# Altium PCB OTP6.PcbDoc
Units mm, origin at the board's own origin, x right, y up, seen from the top; angles counter-clockwise.
Board outline 16.5 x 30.68 mm, 4 copper layers (Top Layer, Internal Plane 1, Internal Plane 2, Bottom Layer), stack 0.778 mm thick; 29 components, 21 nets, 117 pads, 37 vias.
Unrouted connection lines stored in the file: 3.
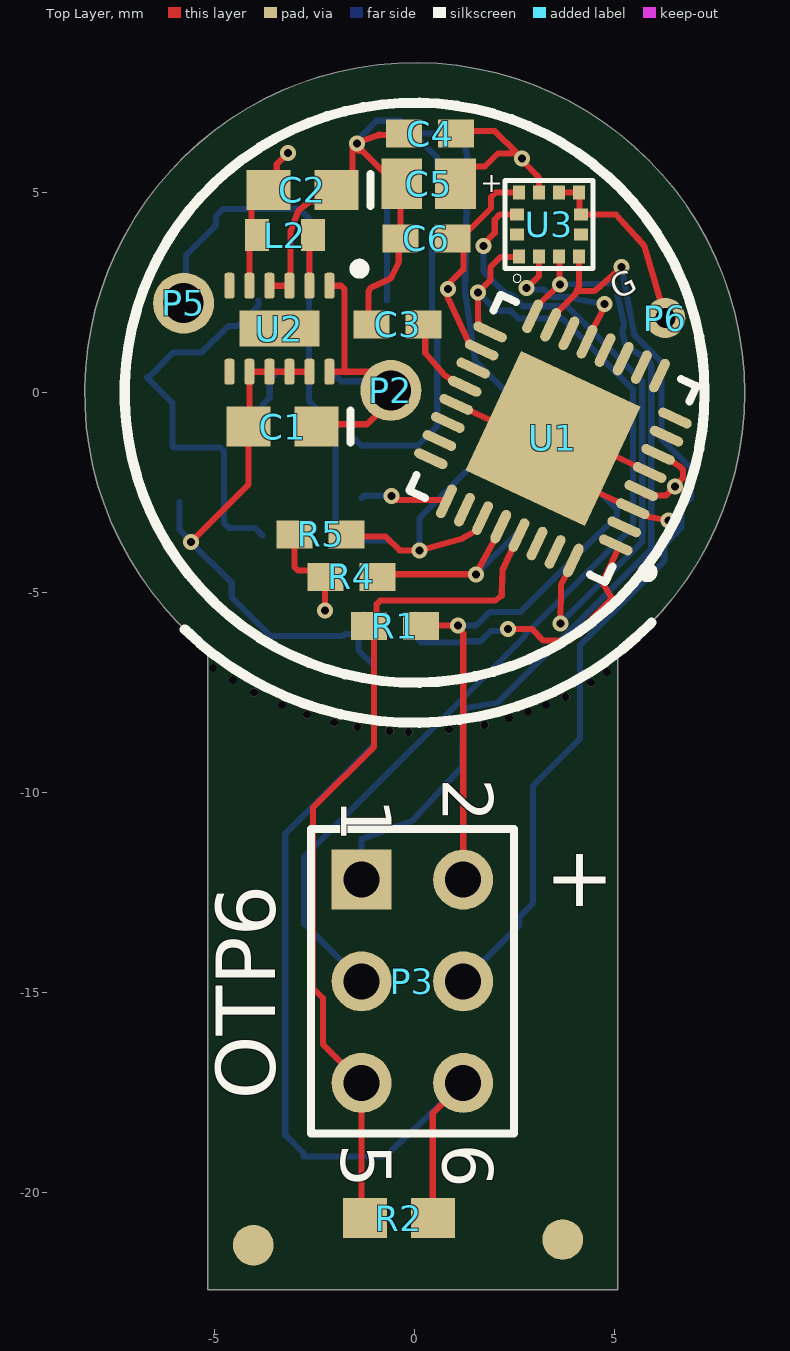
[diagram p0: Top Layer view]
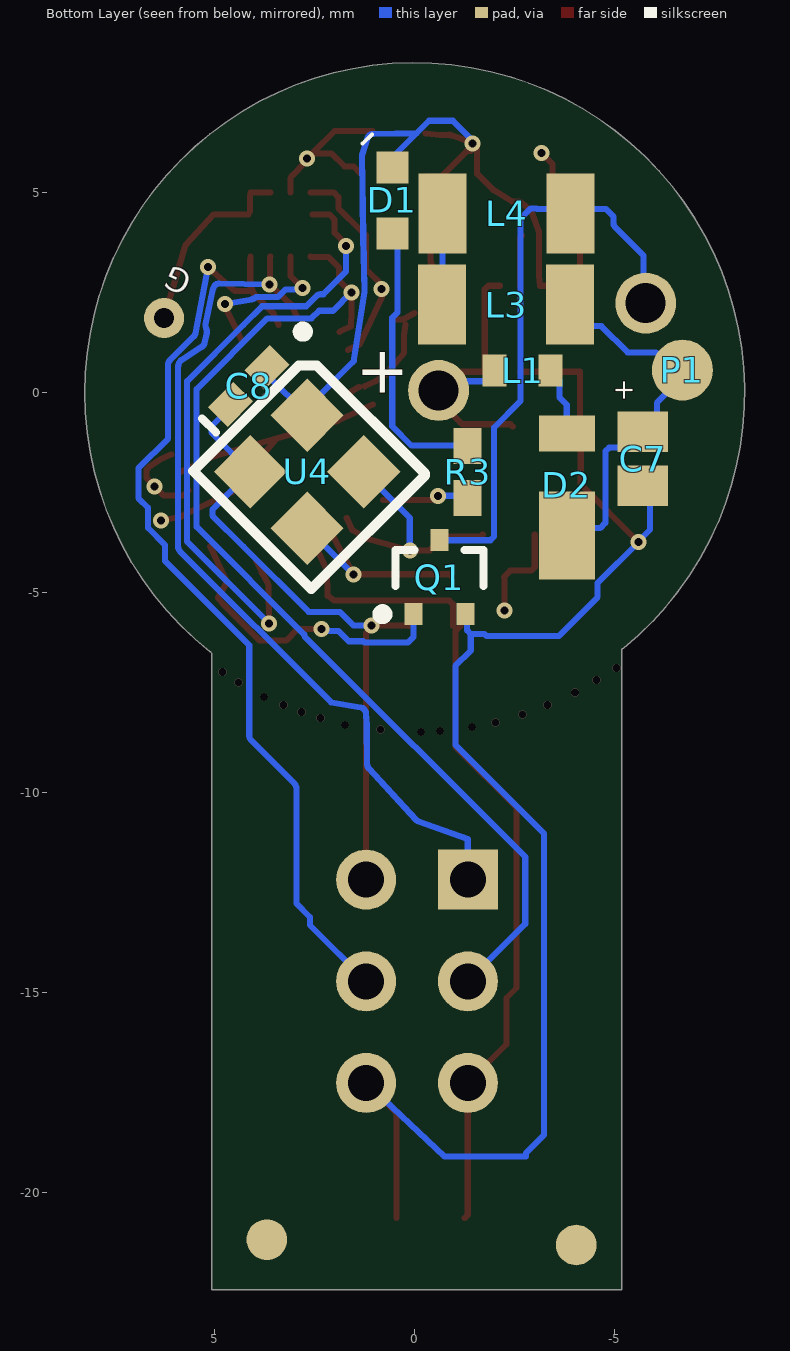
[diagram p1: Bottom Layer view, seen from below]
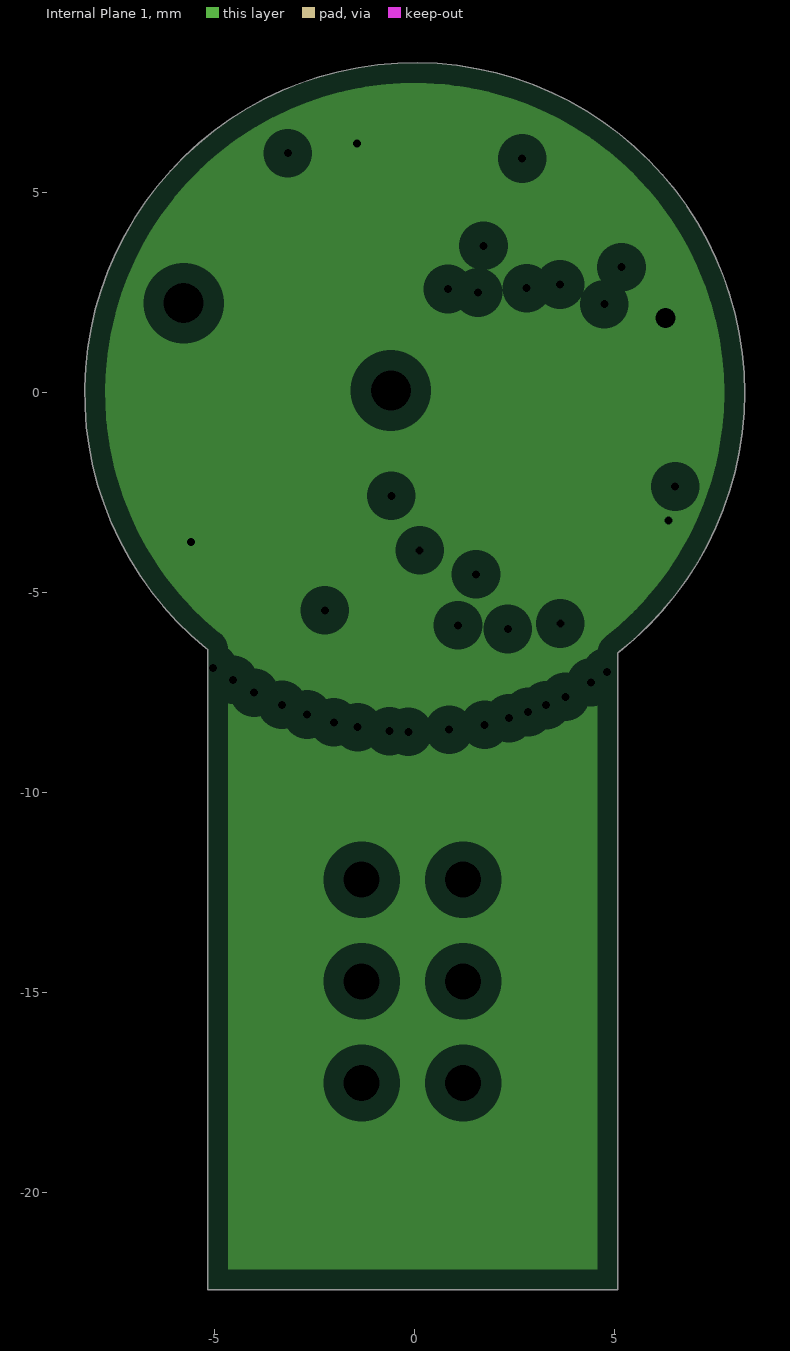
[diagram p2: Internal Plane 1, clearances drawn from the general rule]
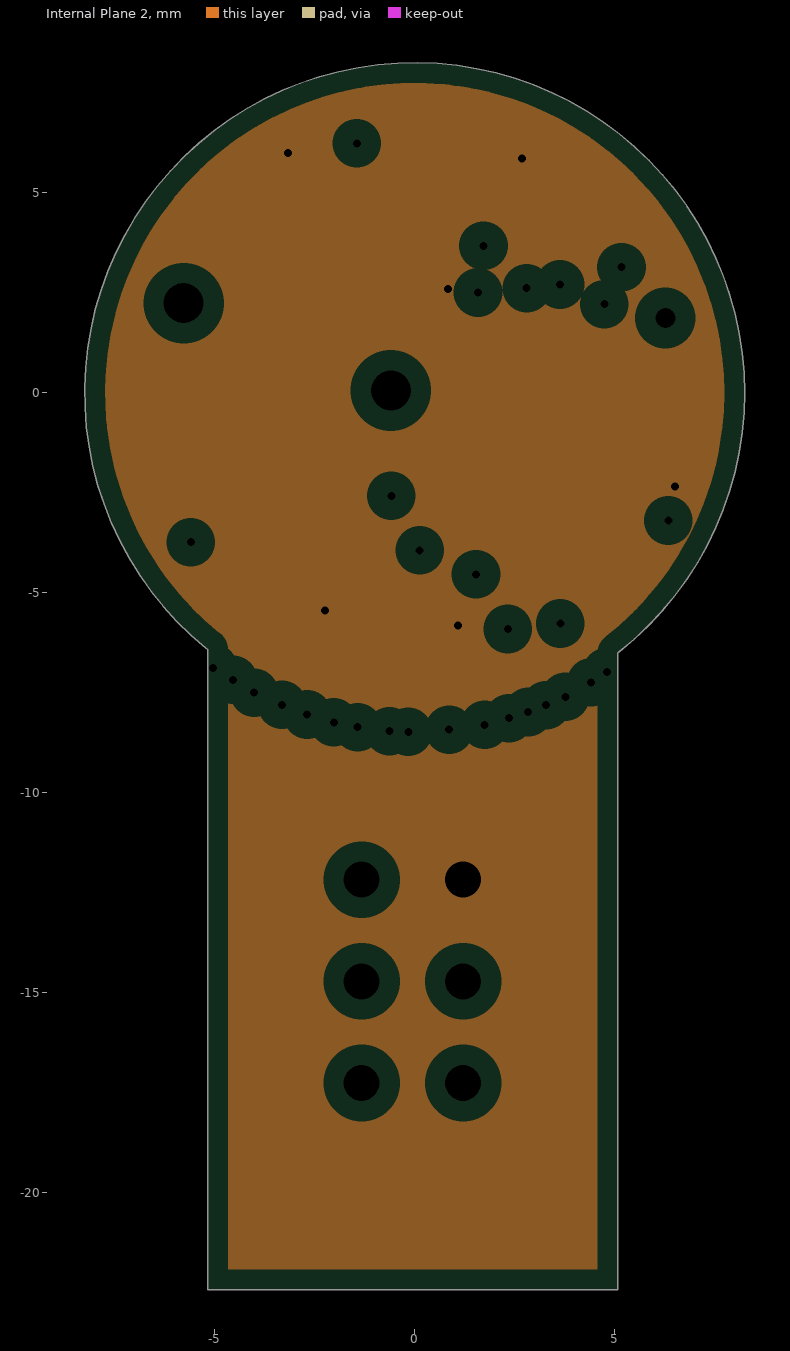
[diagram p3: Internal Plane 2, clearances drawn from the general rule]

## Layer stack, top to bottom
Top Solder: solder mask 0.0102, Solder Resist, Dk 3.5
Top Layer: signal copper 0.0356
Dielectric 1: core 0.254, FR-4, Dk 4.2
Internal Plane 1: plane copper 0.036, net GND
Dielectric 3: prepreg 0.127, Dk 4.2
Internal Plane 2: plane copper 0.036, net V1.8
Dielectric 2: core 0.254, Dk 4.2
Bottom Layer: signal copper 0.0356
Bottom Solder: solder mask 0.0102, Solder Resist, Dk 3.5

## Board outline
-5.173,-22.426 -5.173,-6.414 -5.219,-6.389 cw(c0,0) 5.115,-6.474 5.079,-6.507 5.079,-22.426

## Design rules (kind name [scope] priority, off if disabled: settings)
Clearance [All] p1: gap=0 ignorepadtopadclearanceinfootprint=FALSE
PlaneClearance [All] p1: clearance=0.508
PlaneConnect [All] p1: planeconnectstyle=Relief reliefexpansion=0.508 reliefentries=4 reliefconductorwidth=0.254 reliefairgap=0.254
PolygonConnect [All] p1: connectstyle=Relief reliefconductorwidth=0.254 reliefentries=4 polygonreliefangle="90 Angle" airgapwidth=0.254
RoutingVias [All] p1: holewidth=0.279 width=0.559 viastyle="Through Hole" minholewidth=0.2 minwidth=0.3 maxholewidth=0.711 maxwidth=1.27
SolderMaskExpansion [All] p1: expansion=0.102 istentingtop=FALSE
Width [All] p1: maxlimit=0.762 minlimit=0.152 preferedwidth=0.152
28 further rules are at their usual default settings.

## Classes and differential pairs
component class OTP6_PingCircuit: C7 D2 L1 L3 L4 P1 P5 Q1
component class OTP6: C1 C2 C3 C4 C5 C6 C8 D1 L2 P2 P3 R1 R2 R3 R4 R5 U1 U2 U3 U4

## Components (designator, comment, footprint, x,y, rotation, side; value= is the part's Value field where it differs from the comment)
C1 "C0603" 0603 -3.301,-0.845 r180 top value=10uF
C2 "C0603" 0603 -2.81,5.074 r180 top value=10uF
C3 "0.1uF" 0402 -0.424,1.71 r180 top
C4 "100nF" 0402 0.385,6.478 r180 top value=100pF
C5 "10uF" Tant0805 0.349,5.222 r0 top
C6 "100nF" 0402 0.29,3.861 r180 top value=100pF
C7 "47uF" Tant0805 -5.698,-1.652 r90 bottom value=10uF
C8 "100nF" 0402 4.151,0.17 r135 bottom value=100pF
D1 "LED_0603" Diode0603 0.556,4.81 r90 bottom
D2 "Shottky" DFLS130 -3.801,-2.672 r90 bottom
L1 "47uH" "Inductor KLZ1608AHR" -2.699,0.55 r180 bottom
L2 "2.2uH" "Inductor KLZ1608AHR" -3.246,3.937 r0 top
L3 "120uH" Inductor_NLV32T -2.283,2.2 r0 bottom
L4 "120uH" Inductor_NLV32T -2.294,4.476 r180 bottom
P1 "Header 1x1 1mm" Header1x1mm#1 -6.693,0.566 r90 bottom
P2 "Header 1x1 1mm" Header1x1mm#2 -13.14,2.135 r0 top
P3 "AVR SPI" HDR2X3 -1.326,-12.176 r270 top
P5 "Header 1x1 1mm" Header1x1mm#3 -5.775,2.238 r0 top
P6 "Header 1x1 1mm" Header1x1mm#4 6.267,1.866 r0 top (schematic designator P4)
Q1 "PMF250XN,115" NXP-SOT323_N -0.617,-4.612 r90 bottom
R1 "10k" 2-0402 -0.492,-5.835 r0 top
R2 "omit" 3-0603 -0.397,-20.634 r0 top
R3 "330" 2-0402 -1.324,-1.982 r270 bottom
R4 "10k" 2-0402 -1.585,-4.603 r0 top
R5 "10k" 2-0402 -2.351,-3.542 r0 top
U1 "ATmega8-16AC" 32M1-A_M 3.456,-1.142 r155 top
U2 "TPS62740" TPS6274x -2.132,2.675 r270 top
U3 "LIS2DS12" LGA-12 2.609,3.407 r90 top
U4 "MS5837" MS5837 2.693,-0.56 r225 bottom

## Footprints (in the part's own frame and the unit in brackets; to place one, negate y for a bottom-side part, rotate by r counter-clockwise, add the part's x,y. Pads: shape width x height; smd on the part's side, far side on the other; paste and mask are expansions set on the pad)
2-0402 [mm] "Chip Resistor; Body 1 x 0.5 mm (LxW typ)"
  rect 0.9x0.7 smd: 1(-0.65,0) 2(0.65,0)
3-0603 [mm] "Chip Resistor; Body 1.6 x 0.9 mm (LxW typ)"
  rect 1.1x1 smd: 1(-0.85,0) 2(0.85,0)
32M1-A_M [mm] "QFN, 32-Leads, Body 5x5mm, Pitch 0.5mm, Thermal Pad 3.3x3.3mm, IPC Low Density"
  oval 0.9x0.25 smd: 1(-2.55,1.75) 2(-2.55,1.25) 3(-2.55,0.75) 4(-2.55,0.25) 5(-2.55,-0.25) 6(-2.55,-0.75) 7(-2.55,-1.25) 8(-2.55,-1.75) 17(2.55,-1.75) 18(2.55,-1.25) 19(2.55,-0.75) 20(2.55,-0.25) 21(2.55,0.25) 22(2.55,0.75) 23(2.55,1.25) 24(2.55,1.75)
  oval 0.25x0.9 smd: 9(-1.75,-2.55) 10(-1.25,-2.55) 11(-0.75,-2.55) 12(-0.25,-2.55) 13(0.25,-2.55) 14(0.75,-2.55) 15(1.25,-2.55) 16(1.75,-2.55) 25(1.75,2.55) 26(1.25,2.55) 27(0.75,2.55) 28(0.25,2.55) 29(-0.25,2.55) 30(-0.75,2.55) 31(-1.25,2.55) 32(-1.75,2.55)
  rect 3.3x3.3 smd paste-1.2: 33(0,0)
  silkscreen extent -3.68,-2.7 2.7,2.7, body extent -2.55,-2.55 2.55,2.55, height 1
0402 [mm] "Chip Capacitor; Body 1.0 x 0.5 mm (LxW typ)"
  rect 0.9x0.7 smd: 1(-0.65,0) 2(0.65,0)
0603 [mm] "Chip Capacitor; Body 1.6 x 0.8 mm (LxW typ)"
  rect 1.1x1 smd: 1(-0.85,0) 2(0.85,0)
  silkscreen extent -1.7,-0.4 -1.7,0.4
DFLS130 [mm] "Diode"
  rect 0.9x1.4 smd: A(1.65,0)
  rect 2.2x1.4 smd: K(-0.9,0)
Diode0603 [mm]
  rect 0.8x0.8 smd: A(-0.825,0) K(0.825,0)
  silkscreen extent 1.42,0.51 1.65,0.74
HDR2X3 [mm] "Connector; Header; 3x2 Position"
  rect 1.5x1.5 hole 0.9: 1(0,0)
  round 1.5 hole 0.9: 2(0,2.54) 3(2.54,0) 4(2.54,2.54) 5(5.08,0) 6(5.08,2.54)
  silkscreen extent -1.27,-1.27 6.35,3.81
Header1x1mm#1 [mil]
  round 60 smd: 1(0,0)
Header1x1mm#2 [mil]
  round 60 hole 39.37: 1(493.88,-81.83)
Header1x1mm#3 [mil]
  round 60 hole 39.37: 1(0,0)
Header1x1mm#4 [mil]
  round 39.37 hole 19.68: 1(0,0)
"Inductor KLZ1608AHR" [mm]
  rect 0.6x0.8 smd: 1(-0.7,0) 2(0.7,0)
Inductor_NLV32T [mm]
  rect 1.2x2 smd: 1(-1.6,0) 2(1.6,0)
LGA-12 [mm] "LIS2DS12"
  rect 0.35x0.3 smd: 1(0,0) 2(0,-0.5) 3(0,-1) 4(0,-1.5) 7(1.6,-1.5) 8(1.6,-1) 9(1.6,-0.5) 10(1.6,0)
  rect 0.3x0.35 smd: 5(0.55,-1.55) 6(1.05,-1.55) 11(1.05,0.05) 12(0.55,0.05)
  silkscreen extent -0.65,-1.85 1.9,0.35
MS5837 [mm]
  rect 1.3x1.3 smd: 1(0,0) 2(0,-2) 3(2,-2) 4(2,0)
  silkscreen extent -1.67,-3 3.15,1.52
NXP-SOT323_N [mm] "SOT23, 3-Leads, Body 2.2x1.35mm, Pitch 0.65mm, IPC Medium Density"
  rect 0.55x0.45 smd: 1(-0.925,0.65) 2(-0.925,-0.65) 3(0.925,0)
  silkscreen extent -1.05,-1.1 0.67,1.55, body extent -0.67,-1.1 0.67,1.1, height 1.1
Tant0805 [mil]
  rect 40x50 smd: 1(-26.5,0) 2(26.5,0)
TPS6274x [mm] "QFN, 12-Leads, Body 2.00x3.00mm, Pitch 0.50mm, Thermal Pad 0.90x2.00mm, IPC Medium Density"
  rrect50% 0.65x0.25 smd: 1(0,0) 2(0,-0.5) 3(0,-1) 4(0,-1.5) 5(0,-2) 6(0,-2.5) 7(2.15,-2.5) 8(2.15,-2) 9(2.15,-1.5) 10(2.15,-1) 11(2.15,-0.5) 12(2.15,0)
  rect 0.9x2 smd paste-0.1: 13(1.075,-1.25)
  silkscreen extent -0.55,0.63 -0.3,0.88, body extent 0.03,-2.8 2.12,0.3, height 0.8

## Part data
C1 C2: "Ceramic Chip Capacitor - Standard", PackageDocument=Mar-2001, Code_IPC="1608 [0603]", Code_JEITA=0603, ComponentLink1Description="Manufacturer Link", ComponentLink1URL=http://www.kemet.com/, ComponentLink2Description=Datasheet, ComponentLink2URL=http://www.kemet.com/kemet/web/homepage/kechome.nsf/vapubfilesname/F3102TA.pdf/$file/F3102TA.pdf, DatasheetDocument=Mar-2001, LatestRevisionDate=19-Mar-2004, LatestRevisionNote="Silkscreen size reduced.", Note="Footprint corresponds to dimensions for bulk cassette packaging. This case size has tightened tolerances.", PackageReference=0603, Published=17-Jul-2002, Publisher="Altium Limited"
C3 C4 C6 C8: library part C0402, "Ceramic Chip Capacitor - Standard", PackageDocument=Mar-2001, Code_IPC="1005 [0402]", Code_JEITA=0402, ComponentLink1Description="Manufacturer Link", ComponentLink1URL=http://www.kemet.com/, ComponentLink2Description=Datasheet, ComponentLink2URL=http://www.kemet.com/kemet/web/homepage/kechome.nsf/vapubfilesname/F3102TA.pdf/$file/F3102TA.pdf, DatasheetDocument=Mar-2001, LatestRevisionDate=19-Mar-2004, LatestRevisionNote="Silkscreen size reduced.", Note="Footprint corresponds to dimensions for bulk cassette packaging. This case size has tightened tolerances.", PackageReference=0402, Published=17-Jul-2002, Publisher="Altium Limited"
C5 C7: library part Tant0805
D2: library part DFLS130, Supplier Part Number 1=DFLS130LDITR-ND, Supplier 1=Digi-Key
L1 L2: library part "Inductor KLZ1608", Supplier Part Number 1=810-KLZ1608AHR2R2WTD, Supplier 1=Mouser
L3 L4: library part Inductor_NLV32T, Supplier Part Number 1=NLV32T-121J-EFD, Supplier 1=Mouser
P1 P2 P5 P6: "1mm through hole"
P3: library part "Header 3X2", "Header, 3-Pin, Dual row", LatestRevisionDate=17-Jul-2002, LatestRevisionNote="Re-released for DXP Platform.", Publisher="Altium Limited"
Q1: "N-Channel Trench MOSFET, 30 V, 0.9 A, -55 to 150 degC, 3-Pin SOT323, Tape and Reel", Manufacturer="NXP Semiconductors", Supplier Part Number 1=568-10784-2-ND, Channel Type=N, Ciss [typ] (pF)=50, Code_JEITA=SC-70, ComponentLink1Description="Manufacturer URL", ComponentLink1URL=http://www.nxp.com/, ComponentLink2Description=Datasheet, ComponentLink2URL=http://www.nxp.com/documents/data_sheet/PMF250XN.pdf, ComponentLink3Description="Package Specification", ComponentLink3URL=http://www.nxp.com/documents/outline_drawing/sot323_po.pdf, Coss [typ] (pF)=10, DatasheetVersion="Rev. 1", ID [max] (A)=0.9, Mounting Technology="Surface Mount", PackageDescription="3-Pin Small Outline Transistor Package, Body 2 x 1.25 mm, Pitch 0.65 mm", PackageReference=SOT323, PackageVersion="06-03-16, 03/2006", Packing="Tape & Reel", PartNumber=PMF250XN,115, Supplier 1=Digi-Key, Supplier 2=Digi-Key, Supplier 3=Digi-Key, Supplier 4=Mouser, Supplier Part Number 2=568-10784-1-ND, Supplier Part Number 3=568-10784-6-ND, Supplier Part Number 4=771-PMF250XN,115, VDS [max] (V)=30, VGSth [typ] (V)=1
R1 R3 R4 R5: library part ERJ2RB, "Precision Thick Film Chip Resistor, 10 Ohm to 1M Ohm Range, 1% and 0.5% Tolerance, 0402 Size, 0.063 W", PackageDocument=Mar-2003, Code_IPC="1005 [0402]", ComponentLink1Description="Manufacturer Link", ComponentLink1URL=http://www.panasonic.com/industrial/components/resistive_products.htm, ComponentLink2Description=Datasheet, ComponentLink2URL=http://www.panasonic.com/industrial/components/pdf/AOA0000CE2.pdf, LatestRevisionDate=19-Mar-2004, LatestRevisionNote="Silkscreen size reduced.", PackageReference=2-0402, Published=17-Dec-2003, Publisher="Altium Limited"
R2: library part ERJ3RK, "Precision Thick Film Chip Resistor, 10 Ohm to 1M Ohm Range, 1% and 0.5% Tolerance, 0603 Size, 0.063 W", PackageDocument=Mar-2003, Code_IPC="1608 [0603]", ComponentLink1Description="Manufacturer Link", ComponentLink1URL=http://www.panasonic.com/industrial/components/resistive_products.htm, ComponentLink2Description=Datasheet, ComponentLink2URL=http://www.panasonic.com/industrial/components/pdf/AOA0000CE2.pdf, LatestRevisionDate=19-Mar-2004, LatestRevisionNote="Silkscreen size reduced.", PackageReference=3-0603, Published=17-Dec-2003, Publisher="Altium Limited"
U1: "8-Bit AVR Microcontroller with 8K Bytes of In-System Programmable Flash Memory", Code_JEDEC=MS-026-ABA, ComponentLink1Description="Manufacturer Link", ComponentLink1URL=http://www.atmel.com, ComponentLink2Description=Datasheet, ComponentLink2URL=http://www.atmel.com/dyn/resources/prod_documents/doc2486.pdf, DatasheetVersion=2486H-AVR-09/02, LatestRevisionDate=13-Apr-2006, LatestRevisionNote="IPC-7351 Footprint Added.", PackageDescription="32-Pin Thin Quad Flat Pack 0.8 mm Pitch", PackageReference=32A, PackageVersion="revB, Oct-2001", Published=17-Sep-2003, Publisher="Altium Limited"
U2: library part TPS6274x, Supplier 1=Farnell
U3: Supplier Part Number 1=497-16261-2-ND, Supplier 1=Digi-Key
U4: "Pressure/Temp", Supplier Part Number 1=223-1704-1-ND, Supplier 1=Digi-Key

## Free pads (board coordinates)
  round 1.016 smd far side paste-0.508 mask+0.127: 0(-4.038,-21.308) 0(3.696,-21.174)
  round 1.016 smd paste-0.508 mask+0.127: 0(-4.032,-21.31) 0(3.699,-21.171)

## Via types
v1: diameter 0.4, hole 0.2, Top Layer to Bottom Layer, tented both sides, 20 vias
v2: diameter 0.2, hole 0.2, Top Layer to Bottom Layer, 17 vias

## Nets (pads, with @x,y where several pads share a name; then routed paths per layer and width w, separated by ;. In a path a pad name is that pad's centre, name@x,y a point inside that pad or via, vN(x,y) a via of type N, cw(c..) or ccw(c..) an arc to the next point about the centre after c; other vN are vias at no path point)
BAT: C1.1 L1.1 P2.1 U2.1 U2.12 | length 9.8
  Top Layer w0.152: C1.1 -2.394,-0.788 -1.192,-0.788 P2.1@-0.927,-0.523 ; U2.12 -1.75,0.524 ; U2.1 -1.839,2.675 -1.75,2.585 -1.75,0.524 ; -1.138,-0.74 -0.924,-0.526 P2.1@-0.375,0.023 ; P2.1@-0.948,0.057 P2.1@-0.646,0.057 ; P2.1@-0.352,0 P2.1@-0.375,0.023 ; -1.75,0.524 -0.876,0.524 P2.1@-0.4,0.048 ; P2.1@-0.4,0.048 -0.35,0.048 P2.1@-0.375,0.023 ; P2.1@-0.4,0.048 P2.1@-0.375,0.023
  Bottom Layer w0.152: L1.1@-2.037,0.487 -1.836,0.286 -0.657,0.286 P2.1@-0.419,0.048 ; P2.1@-0.967,0.057 P2.1@-0.666,0.057 ; P2.1@-0.371,0 P2.1@-0.419,0.048 ; P2.1@-0.35,0.048 P2.1@-0.419,0.048
CS: U1.13 U3.2 | length 4
  Top Layer w0.152: v1(2.801,2.612) 3.109,2.92 U3.2 ; U1.13 4.445,1.569 v1@4.697,2.056 ; v1@4.697,2.056 cw(c4.832,1.986) 4.713,2.08 ccw(c4.593,2.175) 4.745,2.194 v1(4.742,2.213)
  Bottom Layer w0.152: v1(2.801,2.612) 2.831,2.583 3.23,2.583 3.421,2.391 3.971,2.391 3.985,2.378 ccw(c4.093,2.486) 4.065,2.336 v1(4.742,2.213)
DTR: P3.5 R1.1 R2.1 U1.29 | length 21.4
  Top Layer w0.152: R2.1 -1.326,-20.555 P3.5 -2.293,-16.288 -2.293,-15.132 -2.544,-14.882 -2.544,-10.38 -1.015,-8.851 -1.015,-5.961 R1.1 ; R1.1@-0.953,-5.835 -0.953,-5.285 -0.863,-5.196 2.015,-5.196 2.176,-5.076 2.196,-4.437 U1.29
GND: C1.2 C2.1 C3.2 C4.2 C5.1 C6.2 C7.1 C8.2 D1.K P3.6 P6.1 Q1.2 R2.2 U1.3 U1.5 U1.21 U1.33 U2.3 U2.4 U2.8 U2.9 U2.10 U2.11 U3.6 U3.7 U3.8 U4.1 | length 74.6
  Top Layer w0.152: v1(-5.594,-3.736) -4.151,-2.293 C1.2 -4.132,-0.827 U2.8 U2.9 U2.10 U2.11 ; U2.4@-3.583,2.723 U2.4 U2.3 -3.109,2.923 -3.109,3.983 cw(c-2.956,3.983) -3.099,4.035 -2.931,4.497 cw(c-2.788,4.445) -2.888,4.56 -2.675,4.745 cw(c-2.575,4.63) -2.575,4.783 -2.433,4.783 C2.1 -1.559,5.474 v1@-1.559,6.208 ; C3.2 -1.15,1.983 -1.15,2.504 cw(c-0.998,2.504) -1.06,2.643 -0.646,2.83 ccw(c-0.709,2.969) -0.571,2.903 -0.413,3.232 ccw(c-0.55,3.298) -0.398,3.298 -0.398,3.587 C6.2 -0.353,4.135 -0.353,4.664 C5.1 ; -0.893,6.434 cw(c-0.842,6.29) -0.842,6.443 -0.638,6.443 C4.2 ; -0.869,6.455 v1@-1.559,6.208 ; C5.1@-0.27,5.403 -0.661,5.403 -1.308,6.049 -1.4,6.049 v1@-1.559,6.208 ; R2.2 0.453,-18.016 P3.6 ; U1.21 1.334,-0.428 1.924,-0.704 U1.33 ; U3.8 U3.7 4.118,4.909 4.118,4.531 U3.6 5.03,4.457 5.709,3.713 cw(c5.597,3.61) 5.743,3.653 P6.1 ; U1.5 5.579,-1.856 4.988,-1.581 U1.33 ; v1(6.34,-3.194) 5.884,-3.107 cw(c5.912,-2.958) 5.836,-3.09 5.745,-3.037 U1.3 5.156,-2.762 4.566,-2.487 U1.33
  Bottom Layer w0.152: C7.1@-5.883,-2.729 -5.883,-3.42 -5.594,-3.709 v1(-5.594,-3.736) -4.573,-4.757 -4.573,-5.112 -3.6,-6.085 -1.8,-6.085 -1.749,-6.033 -1.399,-6.033 ; v1@-1.447,6.304 -0.952,6.798 -0.356,6.798 -0.044,6.486 ; Q1.2 -1.31,-5.58 -1.31,-5.944 -1.399,-6.033 ; D1.K 0.556,5.886 -0.044,6.486 ; P3.6 -0.748,-19.096 -2.779,-19.096 -2.779,-19.012 -3.236,-18.556 -3.236,-11.022 -1.016,-8.802 -1.016,-6.829 -1.399,-6.446 -1.399,-6.033 ; 1.255,2.527 1.514,0.841 1.521,0.792 1.556,0.757 2.693,-0.38 U4.1 2.693,-0.555 C8.2@3.71,0.462 ; 1.255,2.528 cw(c1.406,2.55) 1.254,2.554 1.288,3.888 ; 1.288,3.89 1.315,5.926 ccw(c1.162,5.928) 1.307,5.975 1.181,6.367 ccw(c1.036,6.32) 1.038,6.472 -0.044,6.486
  other v1: -1.445,6.235
HVDD: C7.2 D2.K L3.1 P1.1 | length 9.9
  Bottom Layer w0.152: L3.1@-3.902,2.304 -3.902,2.19 -4.426,1.667 -4.663,1.667 -5.322,1.008 -6.032,1.008 -6.651,0.389 -6.687,0.389 -6.687,0.378 -6.055,-0.254 -6.055,-1.345 -6.027,-1.373 -4.858,-1.373 -4.768,-1.462 -4.768,-3.251 -4.635,-3.385 -3.988,-3.385 D2.K
INT1: U3.12
INT2: U1.32 U3.11 | length 15.7
  Top Layer w0.152: v1(1.722,3.671) 1.722,3.716 2.003,3.997 2.003,4.33 2.131,4.457 U3.11 ; v1(3.643,-5.769) 3.644,-5.758 3.658,-4.832 cw(c3.81,-4.833) 3.677,-4.759 3.827,-4.487 U1.32
  Bottom Layer w0.152: v1(1.722,3.671) 1.722,3.025 2.285,2.462 2.348,2.462 ; 2.349,2.462 cw(c2.347,2.31) 2.454,2.418 2.607,2.267 2.713,2.161 3.815,2.161 4.281,1.694 5.689,0.286 5.689,-3.723 v1(3.643,-5.769)
LED1: R3.2 U1.25 | length 2.2
  Top Layer w0.152: v1(-0.582,-2.576) -0.479,-2.679 U1.25@0.79,-2.679
  Bottom Layer w0.152: R3.2 -1.268,-2.576 v1(-0.582,-2.576) v1@-0.582,-2.575
MISO: P3.1 U1.16 U3.3 | length 22
  Top Layer w0.152: U1.16 3.085,2.203 v1(3.634,2.705) 3.621,2.717 3.621,3.395 U3.3
  Bottom Layer w0.152: P3.1 -1.326,-11.155 -0.094,-10.717 ccw(c-0.144,-10.573) -0.032,-10.676 1.149,-9.391 ccw(c1.037,-9.288) 1.189,-9.29 1.199,-8.316 cw(c1.351,-8.317) 1.199,-8.307 1.22,-8.011 cw(c1.372,-8.022) 1.345,-7.872 ; 1.346,-7.872 2.086,-7.743 5.87,-3.959 ccw(c5.762,-3.851) 5.915,-3.851 5.915,0.643 ccw(c5.762,0.643) 5.911,0.675 5.902,0.717 ccw(c5.753,0.685) 5.836,0.813 5.321,1.147 ; v1(3.634,2.705) 4.886,2.73 cw(c4.889,2.578) 5.038,2.609 5.229,1.715 cw(c5.08,1.682) 5.214,1.61 ccw(c5.348,1.538) 5.199,1.507 5.255,1.243 ccw(c5.404,1.275) 5.321,1.148
MOSI: P3.4 U1.15 U3.4 | length 24.1
  Top Layer w0.152: U1.15 3.538,1.992 4.01,2.465 ccw(c3.902,2.573) 4.052,2.545 ; U3.4 4.113,3.309 4.113,2.725 cw(c3.962,2.705) 4.083,2.612 4.081,2.609 ccw(c4.202,2.517) 4.052,2.545 ; v1(5.17,3.14) 4.546,2.582 cw(c4.444,2.695) 4.444,2.543 4.083,2.545 4.08,2.545 4.052,2.545
  Bottom Layer w0.152: P3.4 2.619,-13.31 2.619,-13.108 2.96,-12.766 2.96,-9.881 cw(c3.113,-9.882) 3.004,-9.775 4.093,-8.686 ccw(c3.984,-8.579) 4.137,-8.579 4.137,-6.312 6.24,-4.209 6.24,-3.809 6.669,-3.381 6.669,-2.874 6.908,-2.635 6.908,-1.888 6.168,-1.147 6.168,0.7 ccw(c6.015,0.7) 6.124,0.807 5.524,1.407 cw(c5.632,1.514) 5.482,1.486 v1(5.17,3.14)
NetC3_1: C3.1 U1.20 | length 2.8
  Top Layer w0.152: C3.1@0.01,1.99 0.078,1.951 0.284,1.833 C3.1@0.536,1.833 ; C3.1 0.266,1.436 0.266,0.992 0.746,0.443 0.956,0.299 U1.20 ; U1.20@1.385,0.145 U1.20@1.576,0.036
NetD1_A: D1.A R3.1 | length 7.2
  Bottom Layer w0.152: R3.1@-1.48,-1.176 R3.1 -1.311,-1.319 0.082,-1.319 0.563,-0.837 0.563,1.873 0.429,2.007 0.429,3.858 D1.A
NetD2_A: D2.A L1.2 | length 1.7
  Bottom Layer w0.152: D2.A -3.801,-0.3 -3.623,-0.122 -3.623,0.326 L1.2
NetL2_2: L2.2 U2.2 | length 1.3
  Top Layer w0.152: L2.2@-2.682,3.93 -2.632,3.88 U2.2
NetL3_2: L3.2 L4.1 | length 2.3
  Bottom Layer w0.152: L3.2@-0.702,2.304 -0.69,2.316 L4.1@-0.69,4.595
PIEZO: L4.2 P5.1 Q1.3 | length 14.6
  Bottom Layer w0.152: P5.1 -5.717,2.295 -5.717,3.432 -5.011,4.138 ccw(c-5.12,4.245) -4.967,4.245 -4.967,4.408 -4.78,4.595 -3.061,4.595 -3.046,4.61 -2.905,4.61 -2.639,4.344 -2.639,-0.212 -1.981,-0.87 -1.981,-3.598 -1.892,-3.687 Q1.3
PWM: Q1.1 U1.1 | length 7.7
  Top Layer w0.152: v1(2.33,-5.906) 2.924,-5.906 3.215,-6.197 3.877,-6.197 4.79,-5.284 4.923,-5.134 4.735,-4.811 cw(c4.866,-4.734) 4.728,-4.669 5.112,-3.845 U1.1
  Bottom Layer w0.152: Q1.1 0.033,-6.111 0.165,-6.244 1.26,-6.244 1.29,-6.214 1.65,-6.214 1.91,-5.953 2.282,-5.953 v1(2.33,-5.906)
SCK: P3.3 U1.17 U3.1 | length 26.4
  Top Layer w0.152: U1.17 1.59,1.659 1.585,2.02 v1(1.585,2.507) 1.895,2.817 1.895,3.133 2.158,3.396 2.597,3.396 U3.1
  Bottom Layer w0.152: P3.3 -2.762,-13.28 -2.762,-11.603 2.758,-6.083 2.758,-6.048 5.455,-3.351 5.455,0.089 3.685,1.859 2.583,1.859 2.393,2.05 2.042,2.05 v1(1.585,2.507)
SCL: R4.2 U1.28 U4.3 | length 5.5
  Top Layer w0.152: R4.2 -0.871,-4.539 v1(1.532,-4.539) 2.015,-3.642 U1.28
  Bottom Layer w0.152: v1(1.532,-4.539) 2.683,-3.388 U4.3
SDA: R5.2 U1.27 U4.4 | length 6.3
  Top Layer w0.152: R5.2 -1.653,-3.59 -0.73,-3.59 -0.378,-3.942 v1(0.124,-3.942) 1.163,-3.655 ccw(c1.121,-3.509) 1.197,-3.641 1.562,-3.431 U1.27
  Bottom Layer w0.152: v1(0.124,-3.942) 0.124,-3.129 U4.4
V1.8: C2.2 C4.1 C5.2 C6.1 C8.1 L2.1 P3.2 R1.2 R4.1 R5.1 U1.4 U1.6 U1.18 U2.5 U3.9 U3.10 U4.2 | length 34.1
  Top Layer w0.152: U2.5 -4.132,3.88 -4.082,3.93 -4.082,5.058 C2.2@-4.02,5.12 ; C2.2 -3.447,5.286 -3.447,5.713 v1(-3.172,5.988) ; R5.1 -3.001,-4.36 -2.911,-4.45 -2.389,-4.45 R4.1 -2.245,-4.614 v1(-2.245,-5.442) ; R1.2 0.177,-5.815 v1(1.083,-5.815) 1.083,-5.882 1.214,-6.013 P3.2 ; v1@0.779,2.647 1.219,3.087 C6.1@1.219,3.939 ; v1(0.832,2.594) 0.727,2.594 1.379,1.206 U1.18 ; C4.1@1.06,6.54 2.006,6.54 v1@2.563,5.984 ; C6.1@1.323,4.03 1.908,4.615 1.908,4.889 2.026,5.007 U3.10 ; C5.2@1.349,5.477 1.527,5.655 1.755,5.655 2.084,5.984 v1@2.563,5.984 ; v1@2.662,5.829 2.733,5.758 3.065,5.426 cw(c2.957,5.319) 3.109,5.319 U3.9 ; v1(2.689,5.857) v1@2.563,5.984 ; U1.4 5.78,-2.565 6.285,-2.565 6.551,-2.299 6.551,-2.285 6.703,-2.133 6.703,-1.92 6.626,-1.843 6.379,-1.678 U1.6
  Bottom Layer w0.152: v1(1.083,-5.815) 1.535,-5.815 1.873,-5.477 2.653,-5.477 4.281,-3.85 5.058,-3.072 5.058,-2.925 U4.2 5.086,-0.995 5.086,-0.845 4.698,-0.457 C8.1@4.629,-0.457
  other v1: 6.511,-2.346
pads on no net: U1.2 U1.7 U1.8 U1.9 U1.10 U1.11 U1.12 U1.14 U1.19 U1.22 U1.23 U1.24 U1.26 U1.30 U1.31 U2.6 U2.7 U2.13 U3.5
copper on no net:
  other v2: -0.629,-8.461 -0.16,-8.477 0.861,-8.425 -1.426,-8.363 1.748,-8.301 -2.021,-8.241 2.359,-8.135 -2.69,-8.045 2.836,-7.982 -3.318,-7.802 3.282,-7.812 3.766,-7.605 -4.013,-7.497 4.412,-7.24 -4.541,-7.18 4.808,-6.982 -5.04,-6.879

## Polygon pours and split planes (outlines as drawn)
GND on Internal Plane 1 (split plane): 175 vertices, not listed, extent -7.741,-8.123 7.742,7.742
no net on Internal Plane 1 (split plane): -4.655,-6.967 -4.308,-7.187 -3.95,-7.39 -3.583,-7.575 -3.207,-7.742 -2.823,-7.89 -2.432,-8.019 -2.036,-8.128 -1.635,-8.219 -1.23,-8.289 -0.821,-8.339 -0.411,-8.369 0,-8.38 0.411,-8.369 0.821,-8.339 1.23,-8.289 1.635,-8.219 2.036,-8.128 2.432,-8.019 2.823,-7.89 3.207,-7.742 3.583,-7.575 3.95,-7.39 4.308,-7.187 4.569,-7.022 4.569,-21.916 -4.663,-21.916 -4.663,-6.962
V1.8 on Internal Plane 2 (split plane): 175 vertices, not listed, extent -7.741,-8.123 7.742,7.742
V1.8 on Internal Plane 2 (split plane): -4.655,-6.967 -4.308,-7.187 -3.95,-7.39 -3.583,-7.575 -3.207,-7.742 -2.823,-7.89 -2.432,-8.019 -2.036,-8.128 -1.635,-8.219 -1.23,-8.289 -0.821,-8.339 -0.411,-8.369 0,-8.38 0.411,-8.369 0.821,-8.339 1.23,-8.289 1.635,-8.219 2.036,-8.128 2.432,-8.019 2.823,-7.89 3.207,-7.742 3.583,-7.575 3.95,-7.39 4.308,-7.187 4.569,-7.022 4.569,-21.916 -4.663,-21.916 -4.663,-6.962

## Other copper
Internal Plane 1 (plane layer: these items are gaps in the copper):
  lines w0.254: -5.748,-5.918 ccw(c0,0) 5.918,-5.748
Internal Plane 2 (plane layer: these items are gaps in the copper):
  lines w0.254: -5.748,-5.918 ccw(c0,0) 5.918,-5.748

## Silkscreen, mask and mechanical layers (free items; w line width, h text height)
Top Overlay:
  circle w0.254: c0,0 r7.25
  lines w0.254: -5.748,-5.918 ccw(c0,0) 5.918,-5.748
  text "G" at 5.141,2.135 h1 r25
  text "+" at 3.248,-12.836 h1.52
  text "OTP6" at -2.999,-17.675 h2.54 r90
Bottom Overlay:
  text "G" at 5.432,3.122 h1 r205
  text "+" at 1.481,-0.388 h2
Mechanical 1:
  lines w0.254: -5.219,-6.389 cw(c0,0) 5.115,-6.474 ; -5.173,-6.414 -5.173,-22.426 5.079,-22.426 5.079,-6.507

## Text inside footprints (layer, text, board x,y; h text height)
C5: Top Overlay "+" at 1.64,5.017 h0.5
C7: Bottom Overlay "+" at -5.444,-0.224 h0.5 r270
P3: Top Overlay "1" at -1.834,-10.144 h1.27 r270; Top Overlay "2" at 0.706,-9.636 h1.27 r270; Top Overlay "5" at -1.834,-18.78 h1.27 r270; Top Overlay "6" at 0.706,-18.78 h1.27 r270